# Altium PCB DATN_PCB_ver1.PcbDoc (part 2 of 2)
Units mm, origin at the board's own origin, x right, y up, seen from the top; angles counter-clockwise.
Board outline 70 x 59.97 mm, 2 copper layers (Top Layer, Bottom Layer), stack 1.569 mm thick; 103 components, 87 nets, 412 pads, 112 vias.
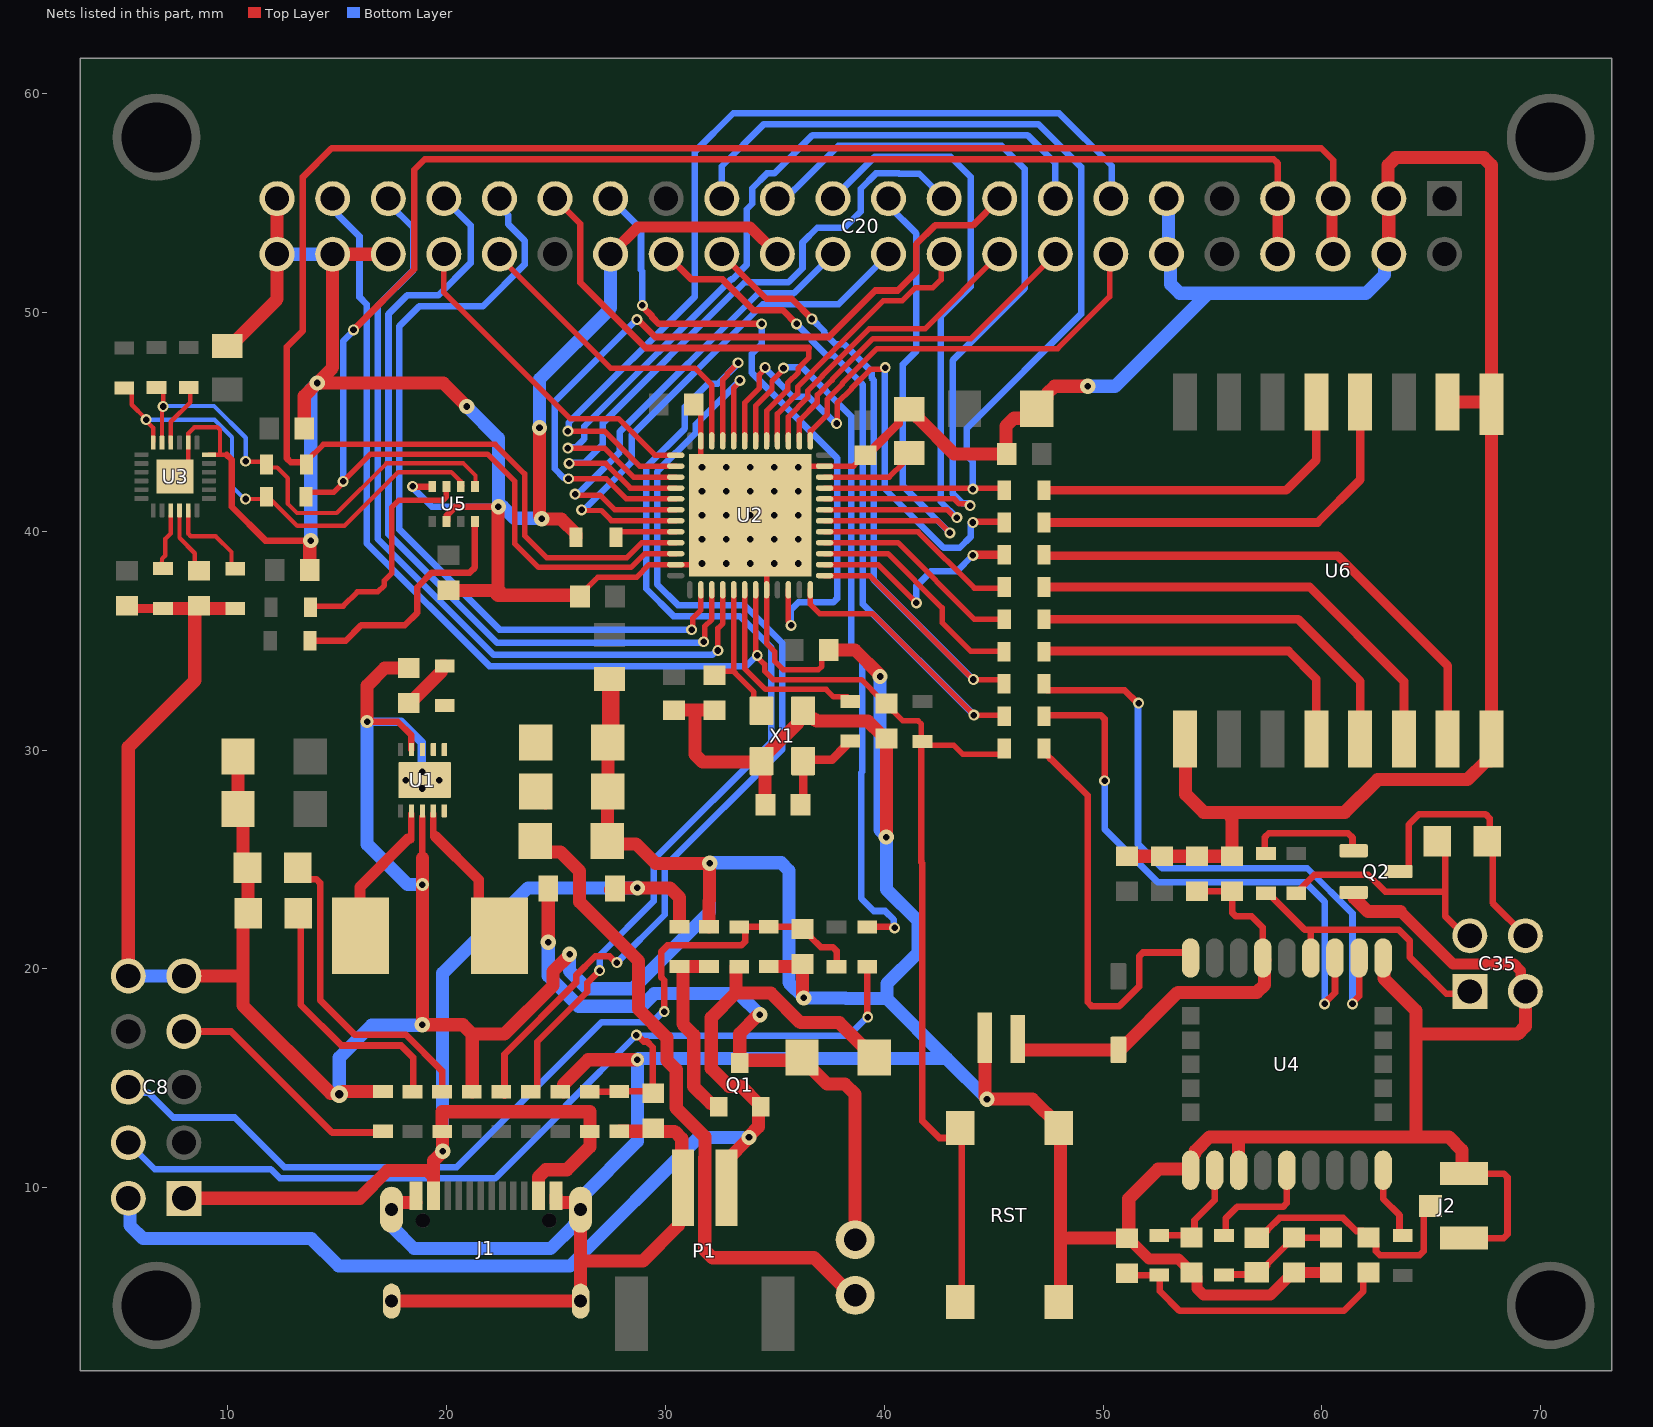
[diagram p2: the nets of this part, all layers, seen from the top]

## Via types
v1: diameter 0.5, hole 0.3, Top Layer to Bottom Layer, 79 vias
v2: diameter 0.7, hole 0.3, Top Layer to Bottom Layer, 26 vias
v3: diameter 0.6, hole 0.3, Top Layer to Bottom Layer, 5 vias
v4: diameter 0.8, hole 0.4, Top Layer to Bottom Layer, 1 vias
v5: diameter 0.9, hole 0.3, Top Layer to Bottom Layer, 1 vias

## Nets (pads, with @x,y where several pads share a name; then routed paths per layer and width w, separated by ;. In a path a pad name is that pad's centre, name@x,y a point inside that pad or via, vN(x,y) a via of type N, cw(c..) or ccw(c..) an arc to the next point about the centre after c; other vN are vias at no path point) (continued)
GND_OUT: BT1.NEG C2.1 C3.1 C4.1 C5.1 C6.1 C7.1 C8.5 C8.6 C9.1 C10.1 C11.1 C12.1 C13.1 C14.1 C15.1 C16.1 C17.2 C18.2 C19.1 C20.2 C20.6 C20.22 C20.23 C20.24 C20.25 C20.29 C20.32 C20.39 C20.43 C21.1 C22.1 C23.1 C24.1 C25.2 C26.1 C27.1 C28.1 C29.2 C30.2 C32.1 C33.2 C34.2 C35.2 C36.1 C37.1 C38.1 C39.1 J1.A1_B12 J1.B1_A12 J1.S1 J1.S2 J1.S3 J1.S4 J2.2 J2.3 P1.1 PWR.2 Q2.2 R1.1 R2.1 R4.2 R11.2 R14.1 R15.1 R23.2 R32.2 R33.2 RST.2 RST.3 U1.3 U1.9 U1.11 U2.8 U2.23 U2.35 U2.47 U2.49 U3.18 U3.20 U3.25 U4.1 U4.10 U4.12 U5.1 U5.7 U6.1 U6.2 U6.9 U6.16 USB.2 X1.2 X1.4 | length 596.2
  Top Layer w0.2: U3.25@8.2,43.1 U3.20@8.2,44.045 8.2,44.469 8.481,44.75 9.533,44.75 9.65,44.633 9.65,43.5 ; U3.18@9.145,43.5 9.65,43.5 ; 9.95,43.5 9.65,43.5
  Top Layer w0.25: C14.1@26.125,37.1 26.82,37.795 26.92,37.895 28.684,37.895 29.264,38.475 31.625,38.475 v1(31.675,38.525) ; C13.1@31.35,45.6 31.45,45.6 31.625,45.425 31.625,42.975 U2.49@31.65,42.95 ; U2.49@34.95,38.55 34.625,38.225 34.625,34.867 34.99,34.503 34.99,34.065 35.38,33.675 37,33.675 37.15,33.825 37.15,34.25 C16.1@37.475,34.575 ; U2.49@36.05,42.95 36.075,42.975 38.6,42.975 39.1,43.475 C12.1@39.15,43.475
  Top Layer w0.3: C28.1@5.375,36.5 5.4,36.475 5.625,36.475 R33.2@7.05,36.475 ; U3.25@7.6,42.5 U3.25@8.2,43.1 ; C8.5@8,19.68 8.095,19.775 C8.5@8.19,19.68 ; 9.95,43.5 10.184,43.266 10.184,41.116 11.725,39.575 v2(13.8,39.575) ; v3(16.375,31.3) 17.775,31.3 18.4,30.675 U1.9@18.4,30.025 ; v1@18.45,42 18.475,42.025 19.325,42.025 U5.1@19.35,42.05 ; J1.A1_B12@18.46,9.14 18.61,9.29 18.61,9.32 J1.A1_B12@18.61,9.64 ; 18.9,25.075 U1.3@18.9,26.946 ; U5.7@20,40.45 20.025,40.475 20.025,40.731 20.419,41.125 v2(22.375,41.125) ; C10.1@36.275,20.111 C10.1@36.275,20.225 ; C12.1@39.15,43.475 39.2,43.475 C12.1@39.5,43.775 ; 48.05,7.3 48.45,7.7 ; 56.024,12.325 56.2,12.149 ; J2.2@66.5,7.7 68.309,7.7 68.485,7.876 68.485,10.474 68.309,10.65 J2.3@66.5,10.65
  Top Layer w0.4: C28.1@5.5,36.6 5.625,36.475 5.627,36.473 R33.2@7.05,36.475 ; C12.1@39.5,43.775 40.652,44.927 40.652,45.225 40.927,45.5 C19.1@41.225,45.5
  Top Layer w0.5: C20.29@27.5,52.66 28.75,53.91 33.87,53.91 C20.32@35.12,52.66 ; C34.2@51.15,7.7 52.101,6.749 53.451,6.749 C33.2@53.75,6.45 ; C33.2@54.05,6.175 54.3,5.925 54.3,5.393 54.593,5.1 57.65,5.1 58.675,6.125 C29.2@58.725,6.125 C30.2@60.425,6.125 C30.2@60.5,6.125 ; 63.6,22.625 66,20.225 68.772,20.225 69.09,19.908 69.09,19.16 C35.2@69.325,18.925
  Top Layer w0.6: C8.6@5.46,19.68 5.46,30.135 8.5,33.175 8.5,36.45 C25.2@8.65,36.45 ; R33.2@7.05,36.475 10.348,36.473 R32.2@10.35,36.473 ; C8.5@8.19,19.68 10.474,19.68 ; C21.1@9.975,48.326 12.26,50.611 C20.23@12.26,52.66 12.26,55.16 C20.22@12.35,55.25 ; C6.1@10.474,29.7 C5.1@10.474,27.3 10.694,27.08 USB.2@10.694,24.845 ; USB.2@10.939,24.6 PWR.2@10.939,22.55 10.694,22.305 10.694,18.331 14.712,14.313 15.062,14.313 v4(15.1,14.275) 15.154,14.275 15.281,14.402 R11.2@17.1,14.402 ; C26.1@13.5,44.7 13.5,46.175 v2(14.1,46.775) ; C27.1@13.75,38.225 13.75,39.525 v2(13.8,39.575) ; v3(16.375,31.3) 16.375,32.95 17.175,33.75 C7.1@18.275,33.75 ; C20.25@17.34,52.66 C20.24@14.8,52.66 14.8,47.475 v2(14.1,46.775) ; J1.S3@17.49,4.82 J1.S4@26.13,4.82 J1.S2@26.13,8.389 ; J1.S1@17.49,9 17.49,9.112 17.698,9.32 J1.A1_B12@18.61,9.32 ; 18.9,25.075 v3(18.9,23.85) v2(18.9,17.45) 20.749,17.45 21.175,17.024 ; C32.1@20.1,37.3 22.125,37.3 ; v2(20.925,45.7) 19.85,46.775 v2(14.1,46.775) ; R1.1@21.175,14.375 21.175,17.024 ; v2@22.35,41.1 22.356,41.094 22.356,41.035 22.35,41.029 22.35,37.075 ; 22.425,37.3 22.125,37.3 ; v2@24.25,44.698 24.25,40.702 24.35,40.602 v2(24.35,40.575) 24.369,40.556 25.242,40.556 25.923,39.875 R23.2@25.923,39.725 ; J1.B1_A12@25.01,9.64 25.01,9.32 25.922,9.32 26.13,9.112 J1.S2@26.13,9 26.302,8.828 J1.S2@26.302,8.425 ; R2.1@25.35,14.391 25.35,14.725 26.475,15.85 v3(28.725,15.85) ; v2(25.625,20.675) 25.625,20.648 24.866,19.889 24.866,19.241 22.649,17.024 21.175,17.024 ; C14.1@26.1,37.075 22.35,37.075 ; 26.225,6.65 28.975,6.65 30.6,8.275 30.6,9.8 P1.1@30.8,10 ; C4.1@27.376,30.35 27.376,28.124 27.363,28.112 27.363,25.863 C2.1@27.351,25.85 27.487,25.714 28.661,25.714 29.55,24.825 v2(32.025,24.825) 32.025,23.125 32,23.1 R4.2@32,21.927 ; R14.1@27.9,12.586 C9.1@29.436,12.586 ; C9.1@29.45,12.6 29.475,12.575 30.423,12.575 30.75,12.248 P1.1@30.75,10.05 ; C15.1@30.4,31.825 31.35,31.825 ; C17.2@32.25,31.825 31.45,31.825 31.35,31.725 31.35,29.801 31.701,29.45 X1.2@34.4,29.45 ; X1.2@34.4,29.5 34.4,29.6 34.65,29.85 34.666,29.85 36.05,31.234 36.05,31.55 X1.4@36.3,31.8 36.3,31.7 36.55,31.45 36.776,31.45 36.901,31.325 39.256,31.325 39.9,30.681 39.9,30.675 C22.1@40.05,30.525 ; C18.2@34.55,27.575 X1.2@34.55,29.35 ; R15.1@35.15,20.111 36.275,20.111 36.275,18.752 36.325,18.702 v2(36.325,18.675) ; C16.1@37.5,34.55 37.6,34.55 37.625,34.575 38.669,34.575 39.792,33.451 39.792,33.381 v2(39.811,33.361) ; v2(40.1,26.025) C22.1@40.1,30.45 ; C19.1@41.15,45.575 41.299,45.575 41.549,45.325 41.549,45.176 43.2,43.525 45.45,43.525 45.55,43.625 C37.1@45.55,43.65 ; BT1.NEG@44.6,16.375 44.6,14.15 v2(44.7,14.05) 46.775,14.05 47.975,12.85 RST.3@47.975,12.725 ; C37.1@45.575,43.725 45.575,44.813 45.926,45.164 46.514,45.164 47,45.651 C36.1@47,45.687 ; C36.1@47.063,45.687 47.438,46.062 47.438,46.274 47.789,46.625 v2(49.3,46.625) ; RST.2@47.975,4.775 48.05,4.85 48.05,7.3 RST.3@48.05,12.65 ; 48.45,7.7 C34.2@51.025,7.7 ; C23.1@51.1,25.15 C24.1@52.7,25.15 C38.1@54.3,25.15 C39.1@55.9,25.15 55.9,26.9 55.8,27 ; C34.2@51.175,7.775 51.175,9.5 52.525,10.85 53.95,10.85 U4.10@54,10.8 ; U6.9@53.775,30.65 53.775,27.975 54.6,27.15 61.05,27.15 62.551,28.651 66.651,28.651 67.5,29.5 67.725,29.5 67.75,29.525 U6.16@67.75,30.5 U6.1@67.75,45.8 ; U4.10@54,10.85 54,11.354 54.21,11.564 54.21,11.669 54.866,12.325 56.024,12.325 64.3,12.325 ; U4.12@56.2,10.8 56.2,12.149 ; Q2.2@61.475,23.5 61.475,23.251 62.101,22.625 63.6,22.625 ; U4.1@62.8,20.5 62.838,20.462 62.838,19.562 64.3,18.1 64.3,17.025 ; C20.2@63.025,55.175 63.025,56.724 63.376,57.075 67.399,57.075 67.75,56.724 67.75,45.9 U6.2@65.75,45.9 ; C20.43@63.06,52.66 C20.2@63.06,55.2 ; J2.3@66.5,10.65 66.401,10.749 66.401,11.724 65.8,12.325 64.3,12.325 ; C35.2@69.3,18.406 69.3,17.376 68.949,17.025 64.3,17.025 ; 22.125,37.3 22.35,37.075 ; 64.3,12.325 64.3,17.025
  Top Layer w0.8: C4.1@27.376,30.35 27.5,30.474 C11.1@27.5,33.25
  Top Layer w0.9: P1.1@30.75,10.05 P1.1@30.8,10
  Bottom Layer w0.2: v1@31.612,39.628 v1@31.628,39.628 ; v1@31.612,41.828 v1@31.628,41.828 ; v1@31.628,38.488 v1@31.628,39.628 ; v1@31.628,42.888 v1@31.628,41.828 ; v1@31.712,38.528 v1@32.728,38.528 ; v1@31.712,40.728 v1@32.728,40.728 ; v1@31.712,42.928 v1@33.85,42.928 ; v1@32.728,38.488 v1@32.728,38.528 ; v1@32.728,42.888 v1@32.728,41.828 ; v1@33.85,38.55 v1@33.85,39.628 ; v1@33.85,42.95 v1@33.85,42.928 ; v1@34.928,38.488 v1@34.928,38.528 ; v1@34.928,42.888 v1@34.928,41.828 ; v1@36.012,39.628 v1@34.928,39.628 ; v1@36.012,41.828 v1@34.928,41.828 ; v1@36.028,38.488 v1@36.028,38.528 ; v1@36.028,42.888 v1@36.028,40.728 ; v1@36.112,38.528 v1@36.028,38.528 ; v1@36.112,40.728 v1@36.028,40.728 ; v1@36.112,42.928 v1@33.85,42.928 ; v1@31.628,39.628 v1@31.628,41.828 ; v1@31.628,39.628 v1@32.728,39.628 ; v1@31.628,41.828 v1@32.728,41.828 ; v1@32.728,38.528 v1@32.728,39.628 ; v1@32.728,38.528 v1@34.928,38.528 ; v1@32.728,39.628 v1@33.85,39.628 ; v1@32.728,39.628 v1@32.728,40.728 ; v1@32.728,40.728 v1@32.728,41.828 ; v1@32.728,40.728 v1@33.85,40.728 ; v1@32.728,41.828 v1@33.85,41.828 ; v1@33.85,39.628 v1@33.85,40.728 ; v1@33.85,39.628 v1@34.928,39.628 ; v1@33.85,40.728 v1@33.85,41.828 ; v1@33.85,40.728 v1@34.928,40.728 ; v1@33.85,41.828 v1@33.85,42.928 ; v1@33.85,41.828 v1@34.928,41.828 ; v1@34.928,38.528 v1@36.028,38.528 ; v1@34.928,38.528 v1@34.928,39.628 ; v1@34.928,39.628 v1@34.928,40.728 ; v1@34.928,40.728 v1@34.928,41.828 ; v1@34.928,40.728 v1@36.028,40.728 ; v1@36.028,38.528 v1@36.028,40.728
  Bottom Layer w0.3: v1@18.45,42 19.325,41.125 22.19,41.125 22.2,41.135 v2@22.2,41.194
  Bottom Layer w0.4: v3(16.375,31.3) 17.925,31.3 18.875,30.35 v1@18.875,29.2
  Bottom Layer w0.6: C8.6@5.46,19.68 C8.5@8,19.68 ; C20.23@12.26,52.66 C20.24@14.8,52.66 ; v2(13.8,39.575) 13.8,46.475 v2(14.1,46.775) ; v4(15.1,14.275) 15.1,15.95 16.575,17.425 v2@18.9,17.425 ; v3@16.4,31.275 16.375,31.25 16.375,25.7 18.225,23.85 v3@18.875,23.85 ; J1.S3@17.49,4.82 17.49,4.742 J1.S3@17.582,4.65 ; J1.S1@17.49,9 17.576,8.914 17.576,8.165 18.516,7.225 24.758,7.225 25.783,8.25 26.13,8.597 26.13,9.525 28.725,12.12 v3(28.725,15.85) 28.781,15.906 42.869,15.906 ; v2(20.925,45.7) 22.375,44.25 v2(22.375,41.125) 22.573,41.125 23.104,40.594 24.331,40.594 v2(24.35,40.575) ; v2(24.25,44.725) 24.25,46.946 27.5,50.196 C20.29@27.5,52.66 ; v2(25.625,20.675) 25.625,19.9 26.432,19.093 28.512,19.093 32.025,22.606 v2(32.025,24.825) 32.05,24.85 35.299,24.85 35.65,24.499 35.65,19.377 36.325,18.702 v2(36.325,18.675) 38.226,18.675 38.251,18.65 40.125,18.65 ; J1.S4@26.038,4.65 26.13,4.742 J1.S4@26.13,4.82 ; v2(39.811,33.361) 39.811,26.341 40.1,26.052 v2(40.1,26.025) 40.1,23.64 41.55,22.19 41.55,20.75 40.125,19.325 40.125,18.65 ; v2(44.7,14.05) 44.7,14.075 42.869,15.906 ; v2(49.3,46.625) 50.55,46.625 54.8,50.875 ; C20.39@52.9,52.66 53,52.76 C20.6@53,55.175 ; C20.39@53.091,52.66 53.091,51.284 53.5,50.875 54.8,50.875 ; C20.43@63.06,52.66 62.869,52.469 62.869,51.719 62.025,50.875 54.8,50.875 ; 40.125,18.65 42.869,15.906
  other v1: 18.9,28.244 18.138,28.625 19.662,28.625 18.9,29.006 32.775,38.525 33.875,38.525 34.975,38.525 36.075,38.525 31.675,39.625 32.775,39.625 33.875,39.625 34.975,39.625 36.075,39.625 31.675,40.725 32.775,40.725 33.875,40.725 34.975,40.725 36.075,40.725 31.675,41.825 32.775,41.825 33.875,41.825 34.975,41.825 36.075,41.825 18.45,42.05 31.675,42.925 32.775,42.925 33.875,42.925 34.975,42.925 36.075,42.925
GPS_1PPS: C35.1 R43.1 U4.4 | length 12.2
  Top Layer w0.3: R43.1@57.6,23.461 57.75,23.311 57.75,23.261 59.211,21.8 59.5,21.8 ; U4.4@59.5,20.947 59.5,21.8 ; C35.1@66.596,18.864 65.686,18.864 64.025,20.525 64.025,21.281 63.506,21.8 59.5,21.8
GPS_RESET: R30.2 U4.9 | length 19
  Top Layer w0.3: R30.2@47.302,29.875 47.352,29.875 47.452,29.775 47.452,29.751 47.628,29.575 47.652,29.575 49.3,27.927 49.3,18.476 49.476,18.3 50.752,18.3 51.65,19.198 51.65,20.574 51.826,20.75 53.769,20.75 54,20.519 U4.9@54,20.5
GPS_RF_IN: C33.1 R41.2 U4.11 | length 5.1
  Top Layer w0.3: R41.2@52.6,7.827 53.973,7.827 54.1,7.7 54.181,7.781 54.181,8.516 55.1,9.434 U4.11@55.1,10.8
GPS_RX: R18.2 U4.3 | length 26.2
  Top Layer w0.3: R18.2@47.327,31.6 49.899,31.6 50.075,31.424 v1(50.075,28.6) ; v1(60.125,18.4) 60.125,18.44 60.6,18.915 U4.3@60.6,20.5
  Bottom Layer w0.3: v1(50.075,28.6) 50.075,26.391 52.497,23.969 59.231,23.969 60.125,23.075 v1(60.125,18.4)
GPS_TX: R19.2 U4.2 | length 28.8
  Top Layer w0.3: R19.2@47.327,33.1 47.327,32.848 47.45,32.725 50.998,32.725 51.573,32.15 v1(51.625,32.15) ; v1(61.4,18.4) 61.4,18.454 61.7,18.754 U4.2@61.7,20.5
  Bottom Layer w0.3: v1(51.625,32.15) 51.6,32.125 51.6,25.704 52.7,24.604 59.331,24.604 61.4,22.535 v1(61.4,18.4)
GPS_VBAT: BT1.POS C38.2 C39.2 D1.C U4.6 | length 19.8
  Top Layer w0.3: C38.2@54.3,23.55 C39.2@55.9,23.55 55.9,22.576 56.076,22.4 56.8,22.4 57.3,21.9 U4.6@57.3,20.5
  Top Layer w0.4: BT1.POS@46.1,16.8 46.1,16.425 BT1.POS@46.225,16.3
  Top Layer w0.6: BT1.POS@46.225,16.3 50.8,16.3 53.425,18.925 57.034,18.925 57.385,19.276 57.385,19.774 57.338,19.82 57.338,20.346 U4.6@57.392,20.4
GPS_VDD_RF: R39.2 U4.14 | length 5.4
  Top Layer w0.3: R39.2@55.6,7.827 55.6,8.6 56.125,9.125 58.224,9.125 58.4,9.301 U4.14@58.4,10.8
I2C1_SCL: C20.3 C20.42 R16.1 U2.45 | length 90.1
  Top Layer w0.25: R16.1@13.599,43.2 14.374,43.975 22.225,43.975 23.575,42.625 23.575,39.8 24.58,38.795 28.245,38.795 28.925,39.475 U2.45@30.475,39.475
  Top Layer w0.3: R16.1@13.596,43.047 13.491,43.153 12.886,43.153 12.71,43.329 12.71,48.435 13.439,49.164 13.439,56.189 14.75,57.5 59.974,57.5 60.52,56.954 C20.3@60.52,55.2 C20.42@60.52,52.66
  Top Layer w0.5: C20.42@60.46,52.66 C20.3@60.46,55.2
I2C1_SDA: C20.4 C20.41 R17.1 U2.46 | length 83.8
  Top Layer w0.25: R17.1@13.589,41.575 13.589,41.602 13.764,41.777 14.844,41.777 15.275,42.207 v1(15.275,42.275) 16.525,43.525 21.875,43.525 23.125,42.275 23.125,39.425 24.205,38.345 28.432,38.345 29.061,38.975 U2.46@30.475,38.975
  Top Layer w0.3: v1(15.75,49.2) 18.525,51.975 18.525,56.519 19.006,57 57.804,57 57.98,56.824 C20.4@57.98,55.2 57.98,54.9 C20.41@57.98,52.66
  Top Layer w0.5: C20.41@57.985,52.36 C20.4@57.985,54.9
  Bottom Layer w0.3: v1(15.275,42.275) 15.275,48.685 15.75,49.16 v1(15.75,49.2)
IMU_nCS: R34.2 U3.22 | length 3
  Top Layer w0.2: U3.22@7.4,44.045 7.4,45 8.3,45.9 R34.2@8.3,46.673
IMU_SCL: R16.2 R35.2 U3.23 U5.4 | length 22
  Top Layer w0.2: U3.23@7,44.045 7,45.65 v1(7.05,45.7) 7.05,46.607 R35.2@7,46.657 ; v1@10.825,43.175 11.724,43.175 R16.2@11.736,43.163 ; R16.2@11.781,43.047 11.916,42.912 12.263,42.912 12.753,42.422 12.753,41.251 13.169,40.835 14.991,40.835 17.255,43.1 20.775,43.1 21.325,42.55 U5.4@21.325,42.05
  Top Layer w0.3: R16.2@11.773,43.05 R16.2@11.773,43.2
  Bottom Layer w0.2: v1(7.05,45.7) 7.075,45.725 9.375,45.725 10.825,44.275 v1@10.825,43.175
  other v1: 10.825,43.2
IMU_SDA: R17.2 R37.2 U3.24 U5.3 | length 22.2
  Top Layer w0.2: R37.2@5.5,46.698 R37.2@5.517,46.681 ; R37.2@5.617,46.656 5.617,45.783 6.25,45.15 6.25,45.072 6.6,44.722 U3.24@6.6,44.09 ; v1@10.8,41.475 11.599,41.475 R17.2@11.643,41.519 ; R17.2@11.704,41.719 13.173,40.25 15.338,40.25 17.788,42.7 20.224,42.7 20.55,42.374 20.646,42.278 20.646,42.267 20.65,42.264 20.65,42.15 U5.3@20.725,42.075
  Bottom Layer w0.2: v1(6.275,45.1) 9.4,45.1 10.2,44.3 10.2,42.05 10.775,41.475 v1@10.8,41.475
  other v1: 10.825,41.475
Lora_CS: R20.2 U6.15 | length 23.9
  Top Layer w0.4: R20.2@47.302,38.925 47.352,38.875 60.725,38.875 65.75,33.85 U6.15@65.75,30.5
Lora_DIO0: R26.2 U6.5 | length 15.7
  Top Layer w0.4: R26.2@47.302,41.875 58.375,41.875 59.75,43.25 U6.5@59.75,45.9
Lora_MISO: R22.2 U6.13 | length 18.3
  Top Layer w0.4: R22.2@47.302,35.975 58.925,35.975 61.75,33.15 U6.13@61.75,30.5
Lora_MOSI: R24.2 U6.14 | length 20.9
  Top Layer w0.4: R24.2@47.302,37.45 59.45,37.45 63.75,33.15 U6.14@63.75,30.5
Lora_RESET: R25.2 U6.4 | length 18.8
  Top Layer w0.4: R25.2@47.302,40.4 59.8,40.4 61.75,42.35 U6.4@61.75,45.9
Lora_SCK: R21.2 U6.12 | length 15.8
  Top Layer w0.4: R21.2@47.277,34.525 58.475,34.525 59.75,33.25 U6.12@59.75,30.5
MCU_NRST: C20.21 C22.2 R30.1 R31.2 RST.1 RST.4 U2.7 | length 80.9
  Top Layer w0.25: U2.7@34.125,37.325 34.125,34.468 34.2,34.393 34.2,34.257 34.54,33.918 34.54,33.61 34.925,33.225 38.956,33.225 39.881,32.3 C22.2@40.05,32.3 ; C22.2@40.05,32.131 40.85,31.331 41.554,31.331 41.7,31.184 41.7,30.579 R31.2@41.755,30.524 ; R31.2@41.7,30.404 41.875,30.229 43.171,30.229 43.6,29.8 R30.1@45.336,29.8
  Top Layer w0.3: R31.2@41.7,30.573 41.7,24.886 41.75,24.836 41.75,13.05 42.525,12.275 43.55,12.275 RST.1@43.55,4.325
  Bottom Layer w0.3: C20.21@14.8,55.2 15.049,54.951 15.049,54.451 16.025,53.475 16.025,50.7 16.35,50.375 16.35,39.454 21.963,33.841 33.694,33.841 34.178,34.325 v1(34.2,34.325)
NetC1_2: C1.2 C2.2 C3.2 C4.2 R10.1 U1.5 | length 31.4
  Top Layer w0.6: C2.2@24.049,25.85 24.049,25.808 24.511,25.346 25.204,25.346 26.081,24.469 26.081,23.059 28.775,20.365 28.775,18.164 30.075,16.864 30.075,15.825 30.5,15.4 30.5,13.641 31.81,12.331 31.81,11.391 31.8,11.381 31.8,7.151 32.151,6.8 36.8,6.8 38.565,5.035 C1.2@38.725,5.035 ; C3.2@24.074,27.947 24.157,27.947 C3.2@24.529,27.574
  Top Layer w0.8: C3.2@24.074,27.947 24.227,28.1 C3.2@24.074,28.253 ; C4.2@24.074,30.081 C4.2@24.227,30.234
NetC7_2: C7.2 R10.2 U1.6 U1.7 U1.8 | length 2.7
  Top Layer w0.3: C7.2@18.4,32.025 C7.2@18.575,31.85
  Top Layer w0.6: C7.2@18.275,32.15 18.325,32.15 19.775,33.6 19.775,33.85 R10.2@19.925,33.85
NetC8_4: C8.4 R11.1 | length 11
  Top Layer w0.3: C8.4@8,17.14 10.16,17.14 14.775,12.525 R11.1@17.096,12.525
NetC18_1: C18.1 R27.1 X1.3 | length 4.3
  Top Layer w0.4: C18.1@36.175,27.5 36.3,27.8 X1.3@36.3,29.5 ; X1.3@36.7,29.5 36.758,29.558 37.616,29.558 38.25,30.192 38.25,30.342 38.35,30.442 R27.1@38.5,30.442
NetC19_2: C19.2 U2.22 | length 3.9
  Top Layer w0.25: U2.22@37.275,42.475 40.225,42.475 C19.2@40.9,43.15
NetC25_1: C25.1 U3.10 | length 2.8
  Top Layer w0.2: U3.10@7.8,40.675 7.8,39.7 8.5,39 C25.1@8.5,38.2
NetC29_1: C29.1 C30.1 L2.1 R39.1 | length 5.6
  Top Layer w0.3: R39.1@55.45,6.036 L2.1@56.95,6.036 ; L2.1@56.95,6.136 57.035,6.136 L2.1@56.961,6.136 ; L2.1@57.185,6.111 57.505,6.431 57.505,6.505 58.65,7.65 C29.1@58.7,7.65 ; C29.1@58.725,7.725 C30.1@60.425,7.725
NetC31_1: C31.1 J2.1 L2.2 | length 11.1
  Top Layer w0.3: L2.2@57.1,7.689 57.185,7.689 57.505,8.009 57.505,8.071 58.059,8.625 60.97,8.625 61.57,8.025 61.875,8.025 62.475,7.425 62.475,7.101 62.651,6.925 64.474,6.925 64.65,7.101 64.65,8.85 J2.1@64.975,9.175
NetC31_2: C31.2 C34.1 R41.1 | length 13.1
  Top Layer w0.3: C34.1@51.1,6.1 51.189,6.011 52.6,6.011 52.6,5.276 53.501,4.375 60.999,4.375 61.9,5.276 C31.2@61.9,6.05
NetC35_3: 1PPS.2 C35.3 Q2.3 | length 12.6
  Top Layer w0.3: Q2.3@63.5,24.45 63.821,24.45 63.971,24.6 63.971,26.596 64.45,27.075 67.475,27.075 67.665,26.885 1PPS.2@67.665,25.835 ; 1PPS.2@67.709,25.75 1PPS.2@67.936,25.75 ; 1PPS.2@67.8,25.7 67.8,23.015 C35.3@69.3,21.515
NetC35_4: 1PPS.1 C35.4 R42.1 | length 12.2
  Top Layer w0.3: R42.1@58.825,23.461 59.664,24.3 62.125,24.3 62.893,23.532 65.518,23.532 ; 1PPS.1@65.425,25.8 65.633,25.592 65.633,23.532 65.633,23.417 ; 65.6,23.45 65.633,23.417 ; C35.4@66.6,21.45 65.633,22.417 65.633,23.417
NetL1_1: L1.1 U1.2 | length 6.8
  Top Layer w0.3: 18.375,25.875 18.4,25.9 U1.2@18.4,27.1
  Top Layer w0.4: 18.25,25.95 18.3,26
  Top Layer w0.5: L1.1@16.05,21.325 16.05,23.75 18.25,25.95
NetL1_2: L1.2 U1.4 | length 5.9
  Top Layer w0.3: U1.4@19.4,27.1 19.4,26.15 19.5,26.05
  Top Layer w0.5: 19.5,26.05 21.475,24.075 21.475,22.75 L1.2@21.95,22.275
NetLED1_1: PWR.1 R8.1 | length 11.8
  Top Layer w0.3: PWR.1@13.336,22.525 13.336,18.364 15.2,16.5 17.928,16.5 18.475,15.953 R8.1@18.475,14.405
NetLED2_1: R9.1 USB.1 | length 14.5
  Top Layer w0.3: USB.1@13.2,24.625 13.2,24.589 13.685,24.104 14.049,24.104 14.225,23.929 14.225,18.575 15.8,17 18.135,17 19.8,15.335 R9.1@19.8,14.425
NetQ1_1: Q1.1 R3.1 R4.1 | length 8.4
  Top Layer w0.6: R3.1@30.8,20.111 30.8,17.477 31.3,16.977 31.3,14.625 32.075,13.85 32.35,13.85 32.45,13.75 Q1.1@32.45,13.7 ; R3.1@30.821,20.111 R4.1@32,20.111
NetQ2_1: Q2.1 R43.2 | length 5.5
  Top Layer w0.3: R43.2@57.4,25.277 57.4,26.024 57.576,26.2 61.2,26.2 61.4,26 61.4,25.45 Q2.1@61.45,25.4
NetR23_1: R23.1 U2.44 | length 2.8
  Top Layer w0.25: R23.1@27.739,39.875 27.839,39.975 U2.44@30.475,39.975
NetR32_1: R32.1 U3.11 | length 4.2
  Top Layer w0.2: U3.11@8.2,40.955 8.2,39.892 8.317,39.775 9.45,39.775 10.175,39.05 10.175,38.464 R32.1@10.35,38.289
NetR33_1: R33.1 U3.9 | length 2.5
  Top Layer w0.2: R33.1@6.811,38.4 7,38.589 7,38.739 7.15,38.889 7.15,39.65 7.4,39.9 U3.9@7.4,40.7
NetR36_1: R36.1 U4.18 | length 3.4
  Top Layer w0.3: U4.18@62.8,10.8 62.8,9.5 63.55,8.75 63.55,7.964 R36.1@63.7,7.814
NetR38_1: R38.1 U5.2 | length 10.7
  Top Layer w0.25: R38.1@13.825,36.45 13.95,36.575 15.275,36.575 15.925,37.225 16.853,37.225 17.16,37.531 17.16,37.743 17.5,38.084 17.5,41.104 17.821,41.425 19.854,41.425 20,41.571 U5.2@20,42.05
NetR40_1: R40.1 U5.5 | length 11.7
  Top Layer w0.3: R40.1@13.764,35 15.397,35 16.097,35.7 18.094,35.7 18.662,36.268 18.662,37.443 19.329,38.11 21.064,38.11 21.3,38.346 U5.5@21.3,40.45
OSC_IN: C17.1 U2.5 X1.1 | length 7.4
  Top Layer w0.25: C17.1@32.25,33.425 32.425,33.6 33.1,33.6 33.188,33.512 ; U2.5@33.125,37.325 33.125,33.591 33.188,33.529 33.188,33.512 ; X1.1@34.8,31.8 34.576,31.8 34.051,32.325 34.051,32.649 33.188,33.512
OSC_OUT: R27.2 U2.6 | length 9.1
  Top Layer w0.25: U2.6@33.625,37.325 33.625,33.728 34.578,32.775 37.352,32.775 37.695,32.433 38.325,32.433 R27.2@38.5,32.258
PA0: C20.16 U2.10 | length 30.4
  Top Layer w0.25: U2.10@35.625,37.325 35.625,35.893 35.75,35.768 v1(35.75,35.7)
  Top Layer w0.3: v1(28.95,50.325) 28.95,50.271 29.413,49.808 29.413,49.762 29.7,49.475 v1(34.4,49.475)
  Bottom Layer w0.3: C20.16@27.5,55.2 28.89,53.81 28.89,51.949 28.95,51.889 v1(28.95,50.325) ; v1(34.4,49.475) 34.4,48.55 33.957,48.106 33.957,47.235 37.85,43.342 37.85,36.926 37.674,36.75 36.075,36.75 35.732,36.407 35.732,35.718 v1(35.75,35.7)
PA8: C20.17 U2.29 | length 21
  Top Layer w0.25: U2.29@34.625,44.125 34.625,45.504 35.6,46.479 35.6,46.787 36.075,47.262 36.075,47.45 36.55,47.925 36.55,48.375
  Top Layer w0.3: C20.17@24.96,55.2 26.11,54.05 26.11,51.368 29.103,48.375 36.55,48.375
PA10: R25.1 U2.31 | length 24.8
  Top Layer w0.25: U2.31@33.625,44.125 33.625,45.87 34.3,46.545 34.3,47.16 34.557,47.416 v1(34.557,47.484) ; v1(37.825,44.925) 37.85,44.95 37.85,45.855 38.525,46.53 38.525,46.557 39.368,47.4 v1@40.025,47.4
  Top Layer w0.3: v1@44,40.425 45.461,40.425 R25.1@45.486,40.4
  Bottom Layer w0.3: v1(34.557,47.484) 34.557,47.445 35.126,46.876 35.126,46.851 35.826,46.15 36.546,46.15 37.771,44.925 v1(37.825,44.925) ; v1@40.025,47.4 40.025,41.939 42.714,39.25 43.45,39.25 43.962,39.762 43.962,40.387 v1@44,40.425
  other v1: 44.05,40.4 40.05,47.475
PB0: C20.11 U2.18 | length 22.9
  Top Layer w0.25: U2.18@37.275,40.475 42.452,40.475 v1@43.018,39.909
  Bottom Layer w0.3: C20.11@40.2,55.2 40.2,54.875 41.475,53.6 41.475,48.238 40.857,47.62 40.857,42.07 v1@43.018,39.909
  other v1: 43,39.925
PB1: C20.12 U2.19 | length 30.1
  Top Layer w0.25: U2.19@37.275,40.975 42.891,40.975 43.193,40.673 43.26,40.673 v1@43.324,40.609
  Bottom Layer w0.3: C20.12@37.66,55.2 39.565,57.105 43.045,57.105 43.95,56.2 43.95,51.175 42.585,49.81 42.585,41.348 v1@43.324,40.609
  other v1: 43.325,40.625
PB2: C20.13 U2.20 | length 36.8
  Top Layer w0.25: U2.20@37.275,41.475 43.202,41.475 43.427,41.25 v1@43.975,41.25
  Bottom Layer w0.3: C20.13@35.12,55.2 35.472,55.2 35.866,55.594 35.894,55.594 37.905,57.605 45.37,57.605 46.42,56.555 46.42,55.686 46.43,55.676 46.43,54.724 46.42,54.714 46.42,53.146 46.43,53.136 46.43,52.184 46.42,52.174 46.42,51.095 43.125,47.8 43.125,41.724 43.561,41.288 43.937,41.288 v1@43.975,41.25
  other v1: 43.925,41.175
PB10: C20.14 R26.1 U2.21 | length 44.8
  Top Layer w0.25: U2.21@37.275,41.975 43.932,41.975 43.982,41.925 v1(44.05,41.925) 44.085,41.96 45.401,41.96 R26.1@45.486,41.875
  Bottom Layer w0.3: C20.14@32.58,55.2 32.58,56.679 34.506,58.605 47.045,58.605 49,56.65 49,49.925 43.775,44.7 43.775,43.457 44.05,43.182 v1(44.05,41.925)
PC13: C20.18 U2.2 | length 36.9
  Top Layer w0.25: v1(31.2,35.5) 31.248,35.548 31.248,36.016 31.625,36.393 U2.2@31.625,37.325
  Bottom Layer w0.3: C20.18@22.42,55.2 22.42,54.848 22.828,54.44 22.828,54.022 23.57,53.28 23.57,52.184 21.661,50.275 18.75,50.275 17.85,49.375 17.85,40.075 22.419,35.506 31.194,35.506 v1(31.2,35.5)
PC14: C20.19 U2.3 | length 37.2
  Top Layer w0.25: v1@31.8,34.95 31.8,35.65 32.125,35.975 U2.3@32.125,37.325
  Bottom Layer w0.3: C20.19@19.88,55.2 21.1,53.98 21.1,52.254 19.621,50.775 18.2,50.775 17.35,49.925 17.35,39.868 22.318,34.9 31.449,34.9 31.46,34.912 31.762,34.912 v1@31.775,34.925
  other v1: 31.75,34.95
PC15: C20.20 U2.4 | length 37.4
  Top Layer w0.25: v1(32.4,34.55) 32.4,35.564 32.625,35.789 U2.4@32.625,37.325
  Bottom Layer w0.3: C20.20@17.34,55.2 17.34,55.006 18.48,53.866 18.48,53.146 18.49,53.136 18.49,51.94 16.85,50.3 16.85,39.661 22.161,34.35 32.146,34.35 32.346,34.55 v1(32.4,34.55)
RX1: C20.34 U2.43 | length 24.1
  Top Layer w0.25: v1@26.2,40.9 26.248,40.948 27.081,40.948 27.539,40.49 28.17,40.49 28.185,40.475 U2.43@30.475,40.475
  Bottom Layer w0.3: v1@26.2,40.9 28.475,43.175 28.475,44.399 34.451,50.375 37.915,50.375 C20.34@40.2,52.66
  other v1: 26.175,40.975
RX2_GPSTX: C20.31 R19.1 U2.13 | length 35.5
  Top Layer w0.25: U2.13@37.275,37.975 39.325,37.975 v1@44.113,33.187 ; v1@44.15,33.225 R19.1@45.611,33.225
  Top Layer w0.3: C20.31@32.58,52.66 34.615,50.625 35.775,50.625 v1(36.7,49.7)
  Bottom Layer w0.3: v1(36.7,49.7) 37.262,49.138 37.262,49.063 37.786,48.539 38.186,48.539 39.425,47.3 39.425,47.007 39.525,46.907 39.525,37.775 v1(44.075,33.225) v1@44.15,33.225
SPI1_CS: R20.1 U2.14 | length 10.3
  Top Layer w0.25: U2.14@37.275,38.475 39.725,38.475 v1(41.475,36.725)
  Top Layer w0.4: v1@44.075,38.925 R20.1@45.486,38.925
  Bottom Layer w0.3: v1(41.475,36.725) 41.475,37.499 42.141,38.165 43.315,38.165 v1@44.075,38.925
  other v1: 44.05,38.9
SPI1_MISO: R22.1 U2.16 | length 9.7
  Top Layer w0.25: U2.16@37.275,39.475 40.625,39.475 44.125,35.975 R22.1@45.486,35.975
SPI1_MOSI: R24.1 U2.17 | length 9.3
  Top Layer w0.25: U2.17@37.275,39.975 41.55,39.975 44.125,37.4 R24.1@45.475,37.4
SPI1_SCK: R21.1 U2.15 | length 10.5
  Top Layer w0.25: U2.15@37.275,38.975 40.175,38.975 42.65,36.5 42.65,35.825 43.959,34.516 45.359,34.516 R21.1@45.45,34.425
SPI2_CS: C20.38 U2.25 | length 19.1
  Top Layer w0.25: U2.25@36.625,44.125 36.625,44.567 37.4,45.342 37.4,46.041 38.075,46.716 38.075,46.744 39.681,48.35 47.929,48.35 50.3,50.721 50.3,52.6 C20.38@50.36,52.66
SPI2_MISO: C20.36 U2.27 | length 14
  Top Layer w0.25: U2.27@35.625,44.125 35.625,45.232 36.5,46.107 36.5,46.414 37.175,47.089 37.175,47.117 39.308,49.25 41.87,49.25 C20.36@45.28,52.66
SPI2_MOSI: C20.35 U2.28 | length 12.7
  Top Layer w0.25: U2.28@35.125,44.125 35.125,45.368 36.05,46.293 36.05,46.6 36.725,47.275 36.725,47.303 39.947,50.525 40.822,50.525 41.427,51.13 42.23,51.13 42.6,51.5 42.6,52.52 C20.35@42.74,52.66
SPI2_SCK: C20.37 U2.26 | length 16
  Top Layer w0.25: U2.26@36.125,44.125 36.125,45.07 36.95,45.895 36.95,46.228 37.625,46.903 37.625,46.93 39.495,48.8 43.96,48.8 C20.37@47.82,52.66
SPI3_CS: C20.7 U2.38 | length 43.1
  Top Layer w0.25: v1(25.55,44.575) 27.225,44.575 28.825,42.975 U2.38@30.475,42.975
  Bottom Layer w0.3: v1(25.55,44.575) 25.588,44.613 25.588,44.963 31.35,50.725 31.35,57.35 33.105,59.105 47.995,59.105 50.4,56.7 50.4,55.24 C20.7@50.36,55.2
SPI3_MISO: C20.10 U2.40 | length 30.3
  Top Layer w0.25: v1(25.602,43.099) 25.606,43.103 27.272,43.103 28.4,41.975 U2.40@30.475,41.975
  Bottom Layer w0.3: v1(25.602,43.099) 25.634,43.131 26.306,43.131 27.15,43.975 27.15,44.95 33.21,51.01 33.263,51.01 33.628,51.375 35.625,51.375 36.27,52.02 36.27,53.195 36.945,53.87 38.195,53.87 38.93,54.605 38.93,55.655 39.625,56.35 40.676,56.35 40.686,56.34 41.6,56.34 C20.10@42.74,55.2
SPI3_MOSI: C20.9 U2.41 | length 34.7
  Top Layer w0.25: v1@25.601,42.401 27.299,42.401 28.225,41.475 U2.41@30.475,41.475
  Top Layer w0.3: v1(28.697,49.672) 28.744,49.672 29.541,48.875 37.469,48.875 39.594,51 40.625,51 41.47,51.845 41.47,53.12 42.325,53.975 44.055,53.975 C20.9@45.28,55.2
  Bottom Layer w0.3: v1@25.601,42.401 25.563,42.439 25.363,42.439 24.95,42.852 24.95,45.925 v1(28.697,49.672)
  other v1: 25.575,42.4
SPI3_SCK: C20.8 U2.39 | length 38.1
  Top Layer w0.25: v1(25.55,43.801) 27.225,43.8 28.55,42.475 U2.39@30.475,42.475
  Bottom Layer w0.3: v1(25.55,43.801) 25.582,43.833 25.908,43.833 26.294,44.219 26.294,44.801 33.003,51.51 33.056,51.51 33.73,52.184 33.73,53.136 33.72,53.146 33.72,54.714 33.97,54.964 33.97,55.676 34.644,56.35 34.975,56.35 36.73,58.105 46.545,58.105 47.82,56.83 C20.8@47.82,55.2
SWCLK: C20.26 U2.37 | length 15.4
  Top Layer w0.25: C20.26@19.88,52.66 19.88,50.92 25.65,45.15 27.85,45.15 29.525,43.475 U2.37@30.475,43.475
SWDIO: C20.27 U2.34 | length 14.8
  Top Layer w0.25: C20.27@22.42,52.66 22.42,52.533 27.503,47.45 31.35,47.45 32.125,46.675 U2.34@32.125,44.125
TX1: C20.33 U2.42 | length 21.8
  Top Layer w0.25: v1@25.9,41.6 25.948,41.648 26.515,41.648 26.518,41.65 27.015,41.65 27.69,40.975 U2.42@30.475,40.975
  Bottom Layer w0.3: v1@25.9,41.6 27.925,43.625 27.925,44.556 34.244,50.875 35.875,50.875 C20.33@37.66,52.66
  other v1: 25.875,41.7
TX2_GPSRX: C20.30 R18.1 U2.12 | length 40.3
  Top Layer w0.25: U2.12@36.625,37.325 36.625,36.663 37.05,36.238 39.462,36.238 v1(44.1,31.6) R18.1@45.511,31.6
  Top Layer w0.3: C20.30@30.04,52.66 31.19,51.51 32.616,51.51 34.026,50.1 35.375,50.1 v1(36,49.475)
  Bottom Layer w0.3: v1(36,49.475) 36.699,48.776 36.699,48.701 37.361,48.039 37.686,48.039 39.025,46.7 39.025,36.675 v1(44.1,31.6)
USB_DN: R6.1 U2.32 | length 47.5
  Top Layer w0.25: U2.32@33.125,44.125 33.125,46.544 33.407,46.826 v1(33.407,46.893)
  Top Layer w0.3: R6.1@22.65,14.21 22.65,16.106 25.925,19.381 25.925,19.7 26.8,20.575 27.45,20.575 27.736,20.29 v1(27.79,20.29)
  Bottom Layer w0.3: v1(27.79,20.29) 29.975,22.475 29.975,24.675 35.35,30.05 35.35,34.885 33.61,36.625 30.575,36.625 29.625,37.575 29.625,42.725 31.394,44.494 31.394,44.881 v1(33.407,46.893)
USB_DP: R5.1 U2.33 | length 47.9
  Top Layer w0.25: U2.33@32.625,44.125 32.625,46.925 32.832,47.132 32.832,47.207 v1(33.325,47.7)
  Top Layer w0.3: R5.1@23.975,14.358 24.15,14.533 24.15,16.675 26.437,18.962 26.437,19.362 v1(27,19.925)
  Bottom Layer w0.3: v1(27,19.925) 27,20.625 29.475,23.1 29.475,25 34.85,30.375 34.85,34.678 33.403,36.125 30.368,36.125 29.125,37.368 29.125,42.932 30.894,44.702 30.894,45.683 31.948,46.737 32.393,46.737 33.325,47.668 v1(33.325,47.7)
USB_VBUS: R29.1 U2.30 | length 33.6
  Top Layer w0.25: U2.30@34.125,44.125 34.125,45.733 34.875,46.483 34.875,46.857 35.4,47.382 v1(35.4,47.45)
  Top Layer w0.3: R29.1@39.383,21.894 39.494,21.894 39.525,21.925 40.371,21.925 40.421,21.875 v1(40.475,21.875)
  Bottom Layer w0.3: v1(35.4,47.45) 35.438,47.488 35.938,47.488 35.95,47.5 36.25,47.5 38.5,45.25 38.5,34.682 39,34.182 39,29.004 38.95,28.954 38.95,23.225 39.528,22.647 40.045,22.647 40.437,22.255 40.437,21.913 v1(40.475,21.875)
V_BAT_ADC: C8.8 C10.2 R13.1 R15.2 R28.2 | length 41.8
  Top Layer w0.3: v1(29.95,18.05) 29.95,19.481 29.805,19.626 29.805,20.78 30.1,21.075 33.474,21.075 33.65,21.251 33.65,21.895 33.675,21.92 34.694,21.92 34.725,21.889 34.763,21.927 36.173,21.927 C10.2@36.275,21.825 ; C10.2@36.325,21.825 36.625,21.525 36.625,21.475 37.1,21 37.649,21 37.825,20.824 R28.2@37.825,20.098
  Bottom Layer w0.3: C8.8@5.46,14.6 5.709,14.351 6.377,14.351 7.518,13.21 10.322,13.21 12.596,10.936 20.461,10.936 27.099,17.574 29.419,17.574 29.896,18.05 v1(29.95,18.05)
V_BUS_SENSE: C8.9 C9.2 R12.1 R14.2 R29.2 | length 45.7
  Top Layer w0.3: R12.1@26.55,14.391 26.555,14.396 27.894,14.396 R14.2@27.9,14.402 29.373,14.402 29.425,14.454 29.425,16.423 29.164,16.684 29.018,16.684 28.729,16.974 v1(28.675,16.974) ; v1@39.225,17.8 39.225,20.048 R29.2@39.25,20.073
  Bottom Layer w0.3: C8.9@5.46,12.06 6.67,10.85 11.975,10.85 12.389,10.436 22.236,10.436 25.436,13.636 25.436,13.735 v1(28.675,16.974) 28.699,16.95 38.375,16.95 v1@39.225,17.8
  other v1: 39.25,17.8
V_PWR: C1.1 DIO1.2 Q1.3 R7.2 | length 29.9
  Top Layer w0.6: v2(24.65,21.225) 24.65,23.4 DIO1.2@24.725,23.475 ; Q1.3@33.4,15.7 33.4,17.05 34.231,17.881 34.306,17.881 v2(34.325,17.9) ; Q1.3@33.4,15.725 33.5,15.825 36.124,15.825 36.249,15.7 36.435,15.7 37.396,14.739 38.211,14.739 38.675,14.275 38.675,7.675 C1.1@38.7,7.65
  Bottom Layer w0.6: v2(24.65,21.225) 24.65,19.681 26.038,18.293 28.914,18.293 29.496,18.875 33.35,18.875 v2(34.325,17.9)
VBAT: C8.10 P1.2 Q1.2 R7.1 R13.2 | length 51.9
  Top Layer w0.6: P1.2@32.775,11.225 33.825,12.275 33.825,12.354 34.25,12.779 34.25,13.6 Q1.2@34.35,13.7 ; R13.2@33.375,20.098 33.225,20.098 33.225,18.9 ; Q1.2@34.25,13.85 33.46,14.64 32.917,14.64 32.1,15.457 32.1,17.775 33.225,18.9 ; Q1.2@34.25,13.85 Q1.2@34.35,13.75 ; R7.1@39.551,15.95 39.551,16.014 39.089,16.476 39.025,16.476 37.951,17.55 36.175,17.55 34.825,18.9 33.225,18.9
  Bottom Layer w0.6: C8.10@5.535,9.727 5.535,8.276 6.137,7.675 13.825,7.675 15.075,6.425 25.643,6.425 31.518,12.3 v2(33.825,12.3)
VBUS: C8.1 DIO1.1 J1.A4_B9 J1.B4_A9 R3.2 R9.2 R12.2 | length 51.3
  Top Layer w0.6: C8.1@8,9.52 16.035,9.52 17.305,10.79 19.117,10.79 19.41,10.497 ; J1.A4_B9@19.41,9.64 19.41,10.79 19.41,11.233 19.825,11.648 19.825,12.598 19.8,12.623 19.8,13.475 26.55,13.475 R12.2@26.55,12.575 ; J1.B4_A9@24.21,9.64 24.21,10.497 24.538,10.825 25.5,10.825 26.55,11.875 R12.2@26.55,12.573 ; DIO1.1@27.699,23.675 27.724,23.7 30.2,23.7 30.65,23.25 R3.2@30.65,21.927 R3.2@30.648,21.927
  Top Layer w0.8: DIO1.1@27.605,23.619 DIO1.1@27.612,23.625
  Bottom Layer w0.6: v2(19.825,11.675) 19.825,19.8 23.725,23.7 v2(28.725,23.7)
pads on no net: J1. J1.A8 J1.B8 P1.P1 P1.P2 U3.2 U3.3 U3.4 U3.5 U3.6 U3.7 U3.12 U3.14 U3.15 U3.16 U3.17 U3.19 U3.21 U4.5 U4.7 U4.13 U4.15 U4.16 U4.17 U4.19 U4.20 U4.21 U4.22 U4.23 U4.24 U4.25 U4.26 U4.27 U4.28 U6.6 U6.7 U6.8 U6.10 U6.11

## Polygon pours and split planes (outlines as drawn)
GND_OUT on Top Layer "GND_OUT_L01_P008" (solid, remove dead copper, pour order 8): 2,62.15 2.2,62.35 74.55,62.35 74.55,0.225 74.5,0.275 2.325,0.275
NetC1_2 on Top Layer "NETC1_2_L01_P003" (solid, pour order 3): 19.475,32.325 19.475,31.75 19.55,31.75 20.875,30.425 20.875,27.575 19.75,27.575 19.75,26.85 20.05,26.85 21.875,25.025 24.8,25.025 24.825,25.05 24.825,32.3 24.85,32.325
3.3V_OUT on Top Layer "3.3V_OUT_L01_P004" (solid, pour order 4): 13,33.475 13,33.4 13,26.3 17,26.3 17.375,26.675 18.025,26.675 18.025,27.575 16.95,27.575 16.95,29.7 18.025,29.7 18.025,30.379 15.425,30.379 15.425,33.475
NetC7_2 on Top Layer "NETC7_2_L01_P006" (solid, pour order 6): 20.025,29.725 18.775,29.725 18.775,30.825 17.775,31.825 17.775,32.35 18.4,32.35 20.025,30.725 20.025,30.325
GND_OUT on Bottom Layer "GND_OUT_L02_P009" (solid, remove dead copper, pour order 9): 2.05,62.3 74.3,62.3 74.625,61.975 74.625,0 2.675,0 2.2,0.475

## Silkscreen, mask and mechanical layers (free items; w line width, h text height)
Top Overlay:
  lines w0.22: 9.25,8.275 16.1,8.275 16.1,18.8 9.365,18.8 9.342,18.777 ; 9.292,16.602 16.025,16.602 ; 9.3,10.35 16,10.35 ; 9.34,20.925 14.45,20.925 ; 9.342,13.502 16.1,13.5 ; 12.725,8.275 12.725,18.775 ; 63.9,12.375 63.9,17.05 72.625,17.05 72.65,17.025 ; 63.925,12.375 72.675,12.375 72.675,17 ; 63.925,14.75 72.65,14.75 ; 68.25,12.375 68.25,17.025
  text "GND" at 12.775,57.275 h1.2 r90
  text "3.3" at 30.55,57.25 h1.2 r90
  text "SO3" at 43.325,57.25 h1.2 r90
  text "SI3" at 45.775,57.25 h1.2 r90
  text "CS3" at 50.934,57.245 h1.2 r90
  text "GND" at 53.554,57.241 h1.2 r90
  text "3.3" at 55.9,57.25 h1.2 r90
  text "RST" at 15.425,57.225 h1.2 r90
  text "SCL1" at 60.8,57.225 h1 r90
  text "GND" at 63.5,57.225 h1.2 r90
  text "3.3" at 66.2,57.225 h1.2 r90
  text "PB2" at 35.825,57.2 h1.2 r90
  text "PB1" at 38.237,57.209 h1.2 r90
  text "PB0" at 40.85,57.2 h1.2 r90
  text "SDA1" at 58.225,57.125 h1 r90
  text "BTN4" at 17.85,57.025 h1 r90
  text "BTN0" at 28,57.025 h1 r90
  text "BTN3" at 20.625,57 h1 r90
  text "BTN2" at 22.95,57 h1 r90
  text "BTN1" at 25.5,57 h1 r90
  text "PB10" at 33.125,57 h1 r90
  text "SCK3" at 48.3,57 h1 r90
  text "RX1" at 40.75,48.275 h1.2 r90
  text "TX1" at 38.225,48.25 h1.2 r90
  text "SI2" at 43.35,48.075 h1.2 r90
  text "3.3" at 56.05,48.075 h1.2 r90
  text "3.3" at 66.25,48.075 h1.2 r90
  text "3.3" at 25.539,48.009 h1.2 r90
  text "GRX" at 30.65,47.875 h1.2 r90
  text "GTX" at 33.2,47.875 h1.2 r90
  text "SO2" at 45.95,47.875 h1.2 r90
  text "GND" at 63.7,47.875 h1.2 r90
  text "GND" at 28.15,47.85 h1.2 r90
  text "GND" at 35.725,47.85 h1.2 r90
  text "CS2" at 51.075,47.85 h1.2 r90
  text "GND" at 53.65,47.85 h1.2 r90
  text "SDA1" at 58.55,47.75 h1 r90
  text "GND" at 18,47.725 h1.2 r90
  text "SCL1" at 60.975,47.725 h1 r90
  text "GND" at 12.825,47.7 h1.2 r90
  text "GND" at 15.325,47.7 h1.2 r90
  text "SCK2" at 48.4,47.4 h1 r90
  text "SDIO" at 23.075,46.85 h1.2 r90
  text "SCLK" at 20.5,46.625 h1.2 r90
  text "LORA ATN" at 71.425,39.9 h1.2 r90
  text "GND" at 11.3,19.275 h1
  text "CC" at 13.55,17.125 h1
  text "3.3" at 9.65,17.075 h1
  text "LED+" at 64.225,15.425 h1
  text "LED-" at 68.625,15.425 h1
  text "BAT" at 9.65,15.25 h1
  text "DN" at 13.575,14.95 h1
  text "ADC" at 9.675,13.9 h1
  text "1PPS" at 64.25,13.125 h1
  text "GND" at 69.075,13.075 h1
  text "BUS" at 9.725,12.15 h1
  text "DP" at 13.625,11.6 h1
  text "SEN" at 9.675,10.8 h1
  text "ATN" at 69,9.575 h1
  text "BAT" at 9.65,8.775 h1
  text "BUS" at 13.05,8.775 h1
  text "GPS" at 69.025,7.85 h1
  text "SW" at 37.85,2.475 h1
Mechanical 13:
  lines w0.254: 3.385,59.302 cw(c5.577,59.302) 5.577,61.494 70.948,61.475 cw(c70.948,59.296) 73.127,59.296 73.118,3.971 cw(c70.939,3.971) 70.939,1.791 5.576,1.775 cw(c5.576,3.952) 3.4,3.952 3.385,59.302